# Altium PCB microsmt_pnpboard_v17.pcbdoc (part 1 of 3)
Units mil, origin at the board's own origin, x right, y up, seen from the top; angles counter-clockwise.
Board outline 5834.36 x 5120.39 mil, 2 copper layers (Top Layer, Bottom Layer); 189 components, 130 nets, 641 pads, 1441 vias.
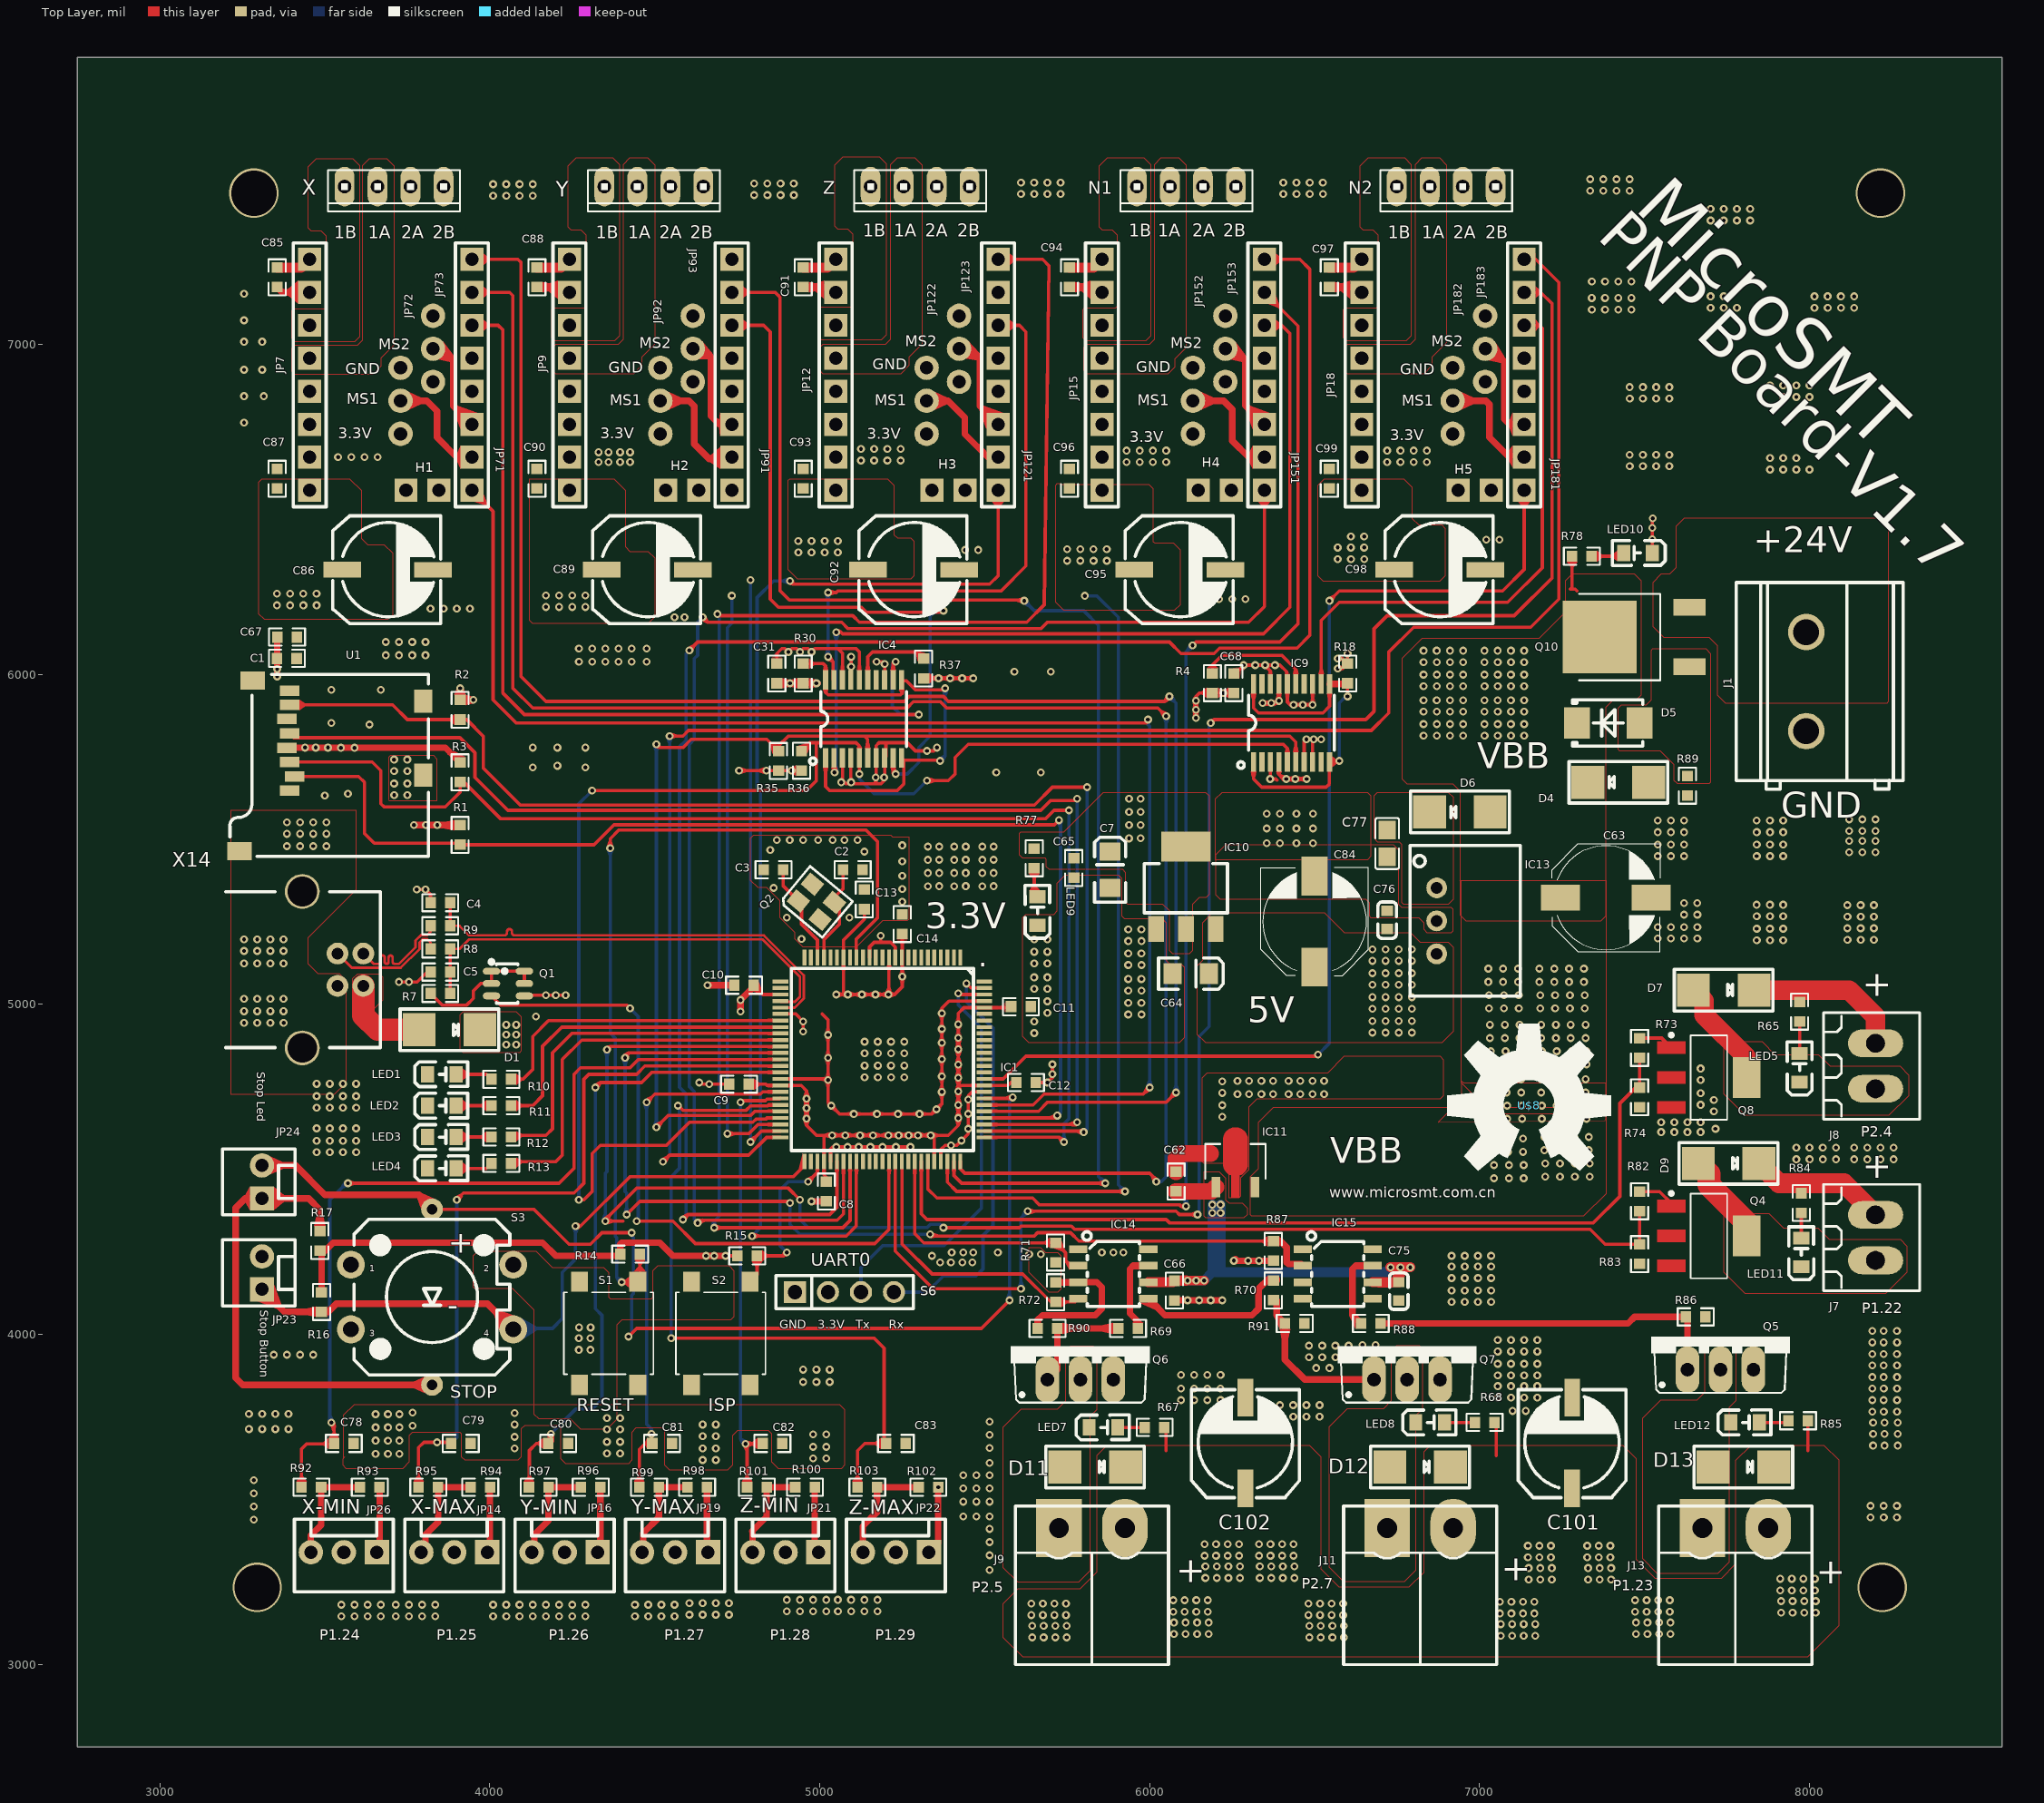
[diagram p0: Top Layer view]
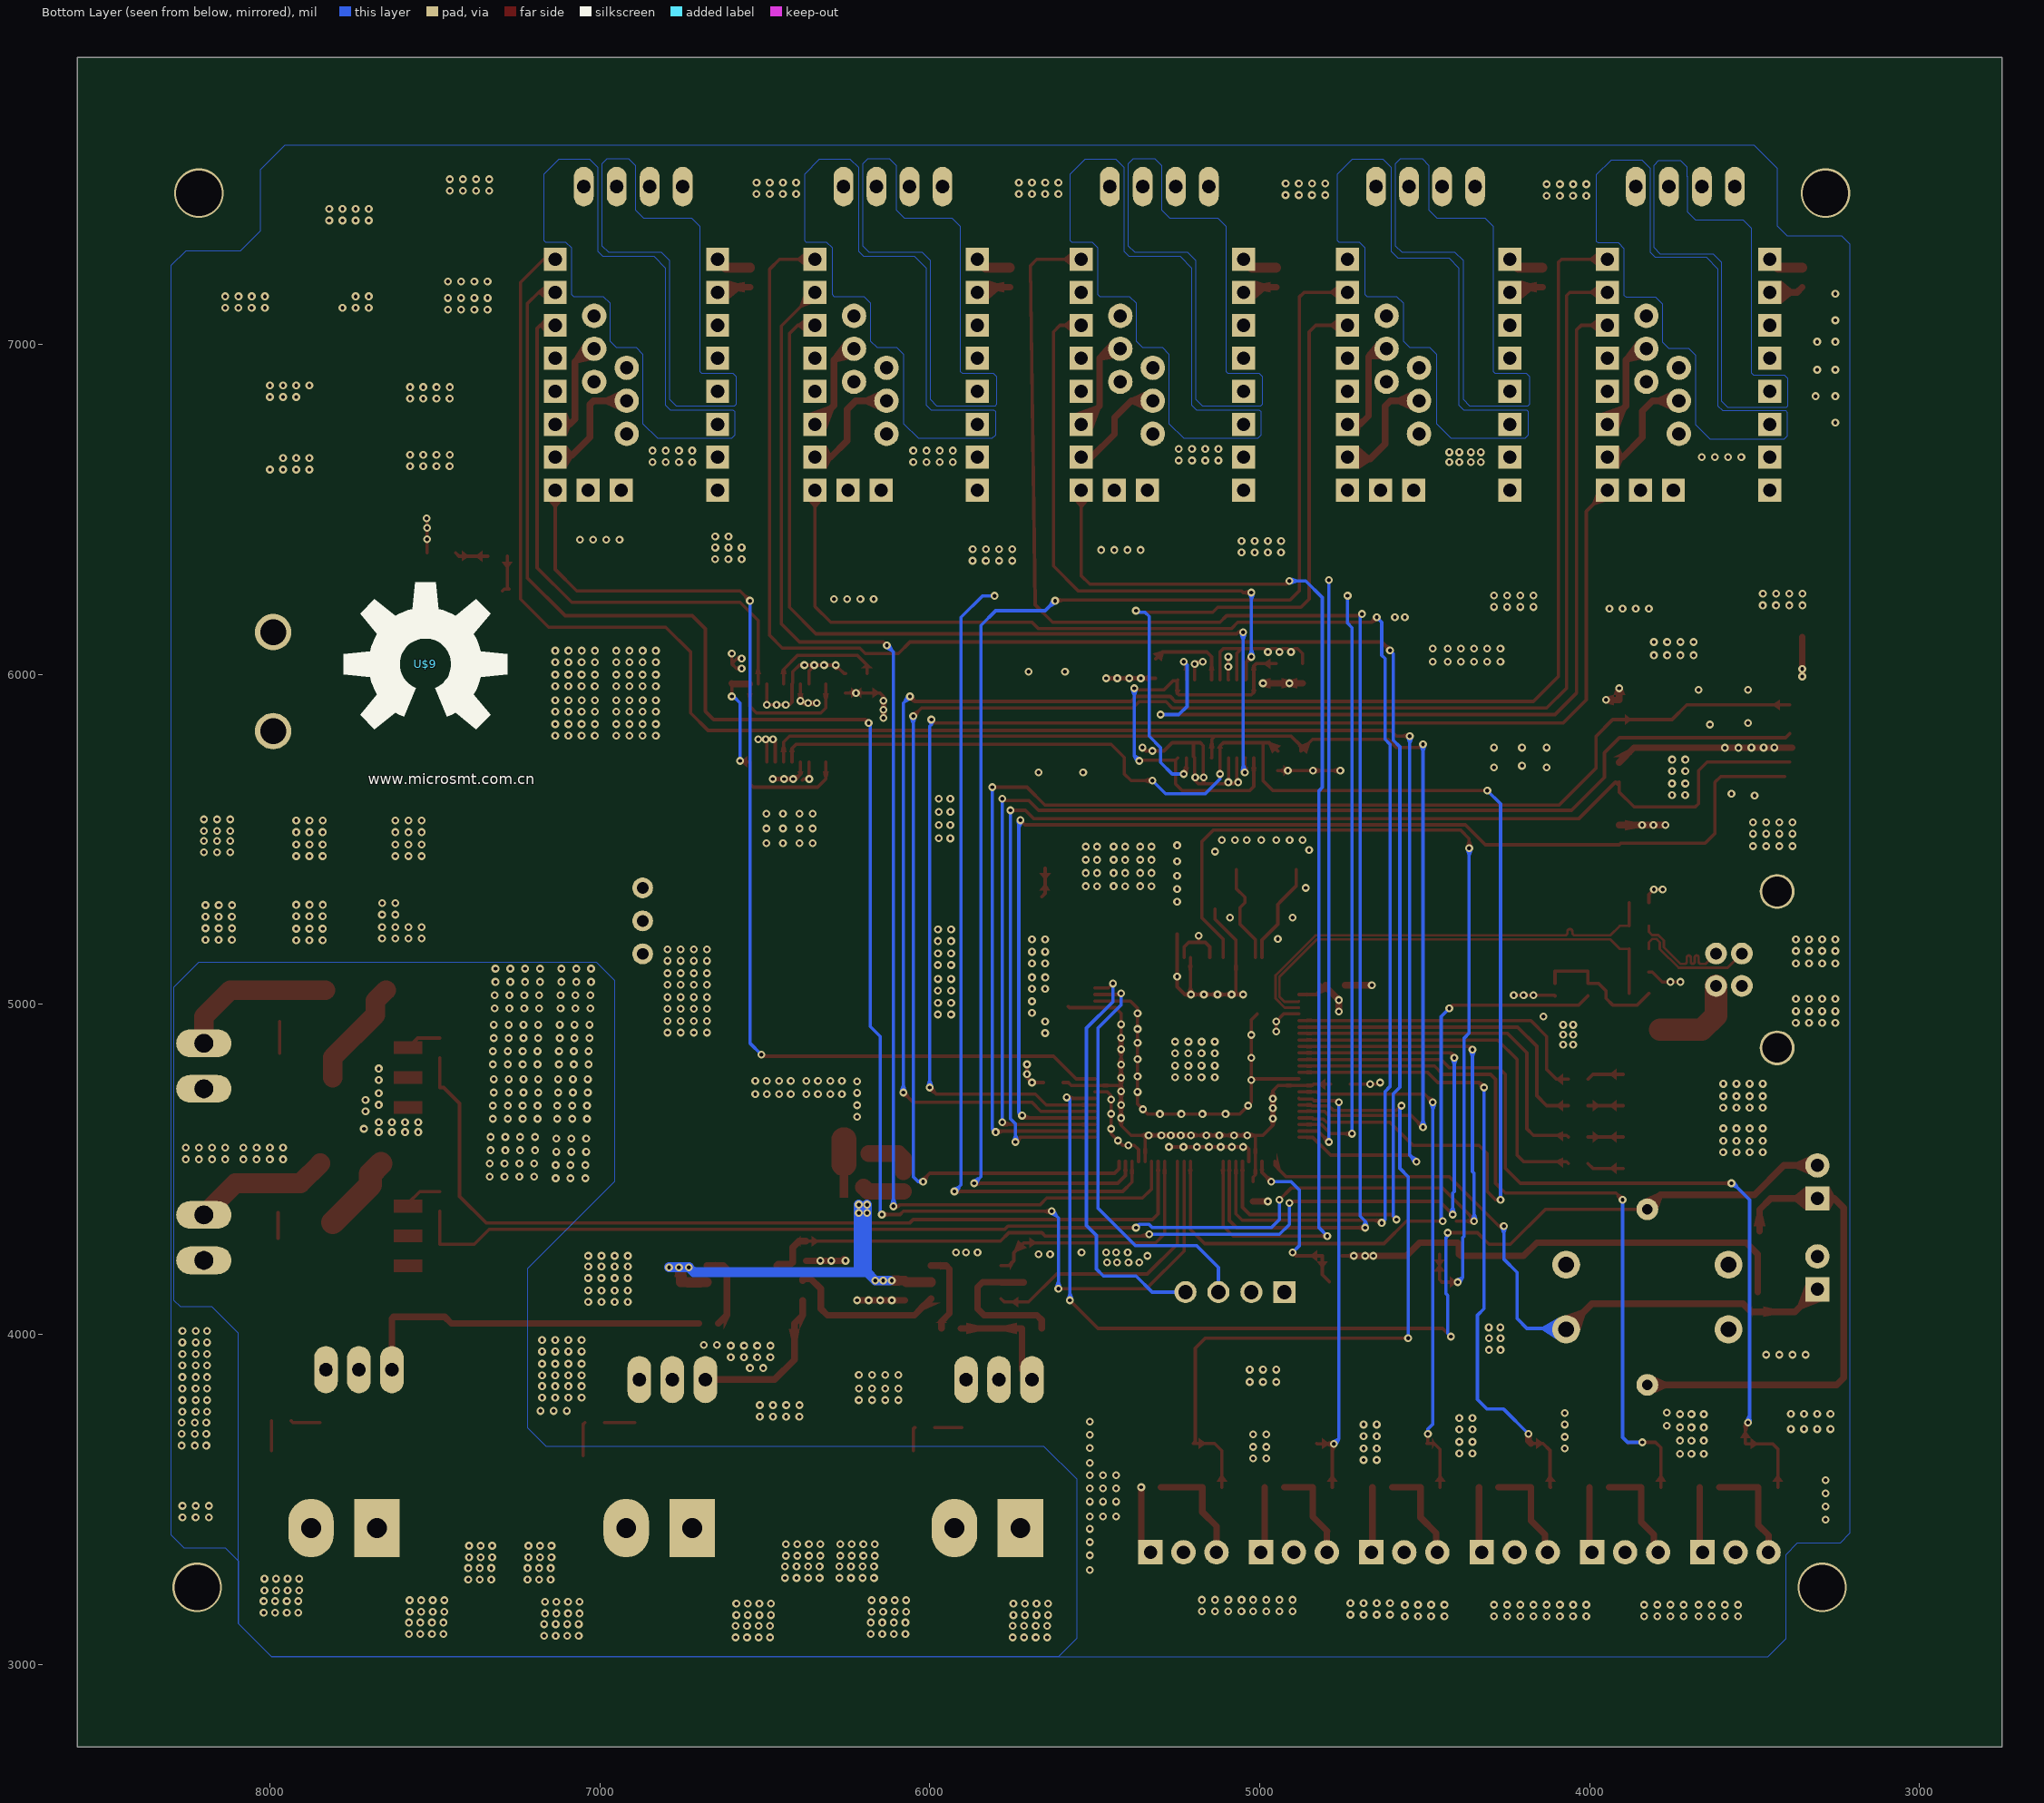
[diagram p1: Bottom Layer view, seen from below]

## Layer stack, top to bottom
Top Solder: solder mask 0.4, Solder Resist, Dk 3.5
Top Layer: signal copper 1.4
Dielectric 1: dielectric 12.6, FR-4, Dk 4.8
Bottom Layer: signal copper 1.4
Bottom Solder: solder mask 0.4, Solder Resist, Dk 3.5

## Board outline
8584.36,2750 2750,2750 2750,7870.39 8584.36,7870.39

## Components (designator, comment, footprint, x,y, rotation, side; value= is the part's Value field where it differs from the comment)
C1 ".1uF" R0603 3385.5,6048.73 r180 top
C2 "12pF" R0603 5100.5,5408.39 r0 top
C3 "12pF" R0603 4860.5,5408.39 r180 top
C4 "18pF" R0603 3850.5,5308.39 r0 top
C5 "18pF" R0603 3850.5,5098.39 r0 top
C7 "10uF" EIA3216 5880.5,5408.39 r90 top
C8 ".1uF" R0603 5020.5,4433.05 r90 top
C9 ".1uF" R0603 4755.84,4758.39 r0 top
C10 ".1uF" R0603 4770.84,5058.39 r0 top
C11 ".1uF" R0603 5610.16,4993.39 r180 top
C12 ".1uF" R0603 5625.84,4763.39 r180 top
C13 ".1uF" R0603 5135.5,5318.39 r270 top
C14 ".1uF" R0603 5250.5,5243.73 r270 top
C31 ".1uF" R0603 4870.5,6003.05 r270 top
C62 ".1uF" R0603 6080.5,4463.39 r90 top
C63 "100uF" SMD8X10.5MM 7245.5,5323.39 r0 top
C64 "10uF" EIA3216 6125.5,5093.39 r0 top
C65 ".1uF" R0603 5770.5,5413.73 r270 top
C66 ".1uF" R0603 6075.5,4133.05 r270 top
C67 "1uF" R0603 3385.84,6113.39 r180 top
C68 ".1uF" R0603 6255.5,5973.73 r270 top
C75 ".1uF" C0603 6755.5,4130.95 r270 top
C76 ".1uF" C0603 6720.5,5255.83 r90 top
C77 ".33uF" C0805 6720.5,5487.84 r270 top
C78 ".1uF" R0603 3558.14,3669.81 r0 top
C79 ".1uF" R0603 3912.47,3669.81 r0 top
C80 ".1uF" R0603 4207.74,3669.81 r0 top
C81 ".1uF" R0603 4522.7,3669.81 r0 top
C82 ".1uF" R0603 4857.35,3669.81 r0 top
C83 ".1uF" R0603 5231.36,3669.81 r0 top
C84 "100uF" SMD8X10.5MM 6500.5,5113.39 r90 top
C85 "100nF" R0603 3355.97,7203.43 r90 top
C86 "100uF" 贴片铝电解8*10.5 3552.82,6317.6 r0 top
C87 "100nF" R0603 3355.97,6593.19 r90 top
C88 "100nF" R0603 4143.37,7203.43 r90 top
C89 "100uF" 贴片铝电解8*10.5 4340.22,6317.6 r0 top
C90 "100nF" R0603 4143.37,6593.19 r90 top
C91 "100nF" R0603 4950.46,7203.43 r90 top
C92 "10uF" 贴片铝电解8*10.5 5147.31,6317.6 r0 top
C93 "100nF" R0603 4950.46,6593.19 r90 top
C94 "100nF" R0603 5757.55,7203.43 r90 top
C95 "100uF" 贴片铝电解8*10.5 5954.4,6317.6 r0 top
C96 "100nF" R0603 5757.55,6593.19 r90 top
C97 "100nF" R0603 6544.95,7203.43 r90 top
C98 "100uF" 贴片铝电解8*10.5 6741.8,6317.6 r0 top
C99 "100nF" R0603 6544.95,6593.19 r90 top
C101 "10uF" 贴片铝电解8*10.5 7280.5,3533.39 r90 top
C102 "10uF" 贴片铝电解8*10.5 6290.5,3533.39 r90 top
D1 "MBRA210LT3" SMADIODE 3878.5,4923.39 r180 top
D4 "B1100-13-F" SMADIODE 7420.5,5673.39 r0 top
D5 "15v" SMB_L4.4-W3.6-LS5.3-RD 7390.5,5853.39 r0 top
D6 "MBRA210LT3" SMADIODE 6940.5,5583.39 r0 top
D7 "MBRA210LT3" SMADIODE 7740.5,5043.39 r180 top
D9 "MBRA210LT3" SMADIODE 7755.5,4518.39 r180 top
D11 "MBRA210LT3" SMADIODE 5835.5,3598.39 r180 top
D12 "MBRA210LT3" SMADIODE 6820.5,3598.39 r180 top
D13 "MBRA210LT3" SMADIODE 7800.5,3598.39 r180 top
H1 "HDR-F_2.54_1x2P" HDR-TH_2P-P2.54-V-F#1 3795.5,6558.39 r0 top
H2 "HDR-F_2.54_1x2P" HDR-TH_2P-P2.54-V-F#2 4595.5,6558.39 r0 top
H3 "HDR-F_2.54_1x2P" HDR-TH_2P-P2.54-V-F#3 5385.5,6548.39 r0 top
H4 "HDR-F_2.54_1x2P" HDR-TH_2P-P2.54-V-F#4 6200.5,6553.39 r0 top
H5 "HDR-F_2.54_1x2P" HDR-TH_2P-P2.54-V-F#5 6990.5,6553.39 r0 top
IC1 "LPC1769" LQFP100_14X14 5190.5,4833.39 r270 top
IC4 "MCP44X1" TSSOP-20_L6.5-W4.4-P0.65-LS6.4-TL 5133.3,5865.23 r90 top
IC9 "MCP44X1" TSSOP-20_L6.5-W4.4-P0.65-LS6.4-TL 6430.5,5853.39 r90 top
IC10 "LM1117-3.3V" PG-SOT223-4_L6.5-W3.5-P2.30-LS7.0-BR 6110.5,5353.39 r270 top
IC11 "78L12F" SOT-89-3_L4.5-W2.5-P1.50-LS4.2-TL 6260.16,4499.99 r90 top
IC13 "R-78E-5.0" PWRM-TH_R-78E3.3-0.5 6870.5,5253.39 r270 top
IC14 "TC4427" SOIC8-1.27-5X4MM 5890.5,4183.39 r270 top
IC15 "TC4427" SOIC8-1.27-5X4MM 6570.5,4183.39 r270 top
J1 "MTA02-100" CONN-TH_P7.62_KF7620-7.62-2P 7990.5,5978.39 r90 top
J7 "MTA02-100" 180G-2 8200.5,4293.39 r270 top
J8 "MTA02-100" 180G-2 8200.5,4813.39 r270 top
J9 "MTA02-100" KF2EDG5.08-2P 5825.5,3413.39 r0 top
J11 "MTA02-100" KF2EDG5.08-2P 6820.5,3413.39 r0 top
J13 "MTA02-100" KF2EDG5.08-2P 7775.5,3413.39 r0 top
JP7 "PINHD-1X8" 1X08-BIG 3454.4,6908.15 r270 top
JP9 "PINHD-1X8" 1X08-BIG 4241.8,6908.15 r270 top
JP12 "PINHD-1X8" 1X08-BIG 5048.89,6908.15 r270 top
JP14 "M03POLAR" MOLEX-1X3 3892.78,3340.16 r180 top
JP15 "PINHD-1X8" 1X08-BIG 5855.97,6908.15 r270 top
JP16 "M03POLAR" MOLEX-1X3 4227.43,3340.16 r180 top
JP18 "PINHD-1X8" 1X08-BIG 6643.37,6908.15 r270 top
JP19 "M03POLAR" MOLEX-1X3 4562.07,3340.16 r180 top
JP21 "M03POLAR" MOLEX-1X3 4896.72,3340.16 r180 top
JP22 "M03POLAR" MOLEX-1X3 5231.36,3340.16 r180 top
JP23 "M02PTH" MOLEX-1X2 3310.03,4186.62 r90 top
JP24 "M02PTH" MOLEX-1X2 3310.03,4462.21 r90 top
JP26 "M03POLAR" MOLEX-1X3 3558.14,3340.16 r180 top
JP71 "PINHD-1X8" 1X08-BIG 3946.53,6908.15 r270 top
JP72 "CON_HEADER_1X03-PTH" 1X03_NO_SILK 3729.99,6829.41 r90 top
JP73 "CON_HEADER_1X03-PTH" 1X03_NO_SILK 3828.41,6986.89 r90 top
JP91 "PINHD-1X8" 1X08-BIG 4733.93,6908.15 r270 top
JP92 "CON_HEADER_1X03-PTH" 1X03_NO_SILK 4517.39,6829.41 r90 top
JP93 "CON_HEADER_1X03-PTH" 1X03_NO_SILK 4615.81,6986.89 r90 top
JP121 "PINHD-1X8" 1X08-BIG 5541.01,6908.15 r270 top
JP122 "CON_HEADER_1X03-PTH" 1X03_NO_SILK 5324.48,6829.41 r90 top
JP123 "CON_HEADER_1X03-PTH" 1X03_NO_SILK 5422.9,6986.89 r90 top
JP151 "PINHD-1X8" 1X08-BIG 6348.1,6908.15 r270 top
JP152 "CON_HEADER_1X03-PTH" 1X03_NO_SILK 6131.56,6829.41 r90 top
JP153 "CON_HEADER_1X03-PTH" 1X03_NO_SILK 6229.99,6986.89 r90 top
JP181 "PINHD-1X8" 1X08-BIG 7135.49,6908.15 r270 top
JP182 "CON_HEADER_1X03-PTH" 1X03_NO_SILK 6918.96,6829.41 r90 top
JP183 "CON_HEADER_1X03-PTH" 1X03_NO_SILK 7017.39,6986.89 r90 top
LED1 "LEDCHIP-LED0805" LED0805-RD 3855.5,4788.39 r0 top
LED2 "LEDCHIP-LED0805" LED0805-RD 3855.5,4693.39 r0 top
LED3 "LEDCHIP-LED0805" LED0805-RD 3855.5,4598.39 r0 top
LED4 "LEDCHIP-LED0805" LED0805-RD 3855.5,4503.39 r0 top
LED5 "LEDCHIP-LED0805" LED0805-RD 7970.5,4808.39 r90 top
LED7 "LEDCHIP-LED0805" LED0805-RD 5860.5,3718.39 r0 top
LED8 "LEDCHIP-LED0805" LED0805-RD 6850.5,3733.39 r0 top
LED9 "LEDCHIP-LED0805" LED0805-RD 5660.5,5283.39 r90 top
LED10 "LEDCHIP-LED0805" LED0805-RD 7480.5,6368.39 r180 top
LED11 "LEDCHIP-LED0805" LED0805-RD 7975.5,4248.39 r90 top
LED12 "LEDCHIP-LED0805" LED0805-RD 7805.5,3733.39 r0 top
N1 "10X04MTA" 10X04MTA 6111.88,7478.39 r180 top
N2 "10X04MTA" 10X04MTA 6899.28,7478.39 r180 top
Q1 "BSL207SP" TSOP-6_L3.0-W1.5-P0.95-LS2.8-BL 4055.5,5063.39 r270 top
Q2 "12MHz" 3.2*2.5_3225贴片无源晶振 4935.5,5313.39 r320 top
Q4 "ZXMN4A06" SOT230P700X160-4N 7695.5,4298.39 r0 top
Q5 "AOT240L" TO220BV 7730.5,3993.39 r0 top
Q6 "AOT240L" TO220BV 5790.5,3963.39 r0 top
Q7 "AOT240L" TO220BV 6780.5,3963.39 r0 top
Q8 "ZXMN4A06" SOT230P700X160-4N 7695.5,4778.39 r0 top
Q10 "SUD50P04-08-GE3" PG-TO252-3_L6.6-W6.0-P4.56-LS10.0-BR-CW 7500.5,6113.39 r0 top
R1 "10K" R0603 3910.5,5513.73 r90 top
R2 "10K" R0603 3910.5,5893.05 r90 top
R3 "10K" R0603 3910.5,5703.73 r90 top
R4 "100K" R0603 6190.5,5973.73 r270 top
R7 "1.5K" R0603 3850.5,5033.39 r180 top
R8 "33R" R0603 3850.5,5168.39 r0 top
R9 "33R" R0603 3850.5,5238.39 r0 top
R10 "1k" R0603 4035.5,4773.39 r0 top
R11 "1k" R0603 4035.5,4693.39 r0 top
R12 "1k" R0603 4035.5,4598.39 r0 top
R13 "1k" R0603 4035.5,4518.39 r0 top
R14 "10K" R0603 4425.84,4243.39 r180 top
R15 "10K" R0603 4780.84,4238.39 r180 top
R16 "10K" R0603 3490.5,4098.39 r90 top
R17 "330R" R0603 3485.5,4283.39 r90 top
R18 "33K" R0603 6600.5,6003.05 r90 top
R30 "33K" R0603 4950.5,6003.05 r270 top
R35 "2.2k" R0603 4875.5,5738.05 r270 top
R36 "2.2k" R0603 4945.5,5738.39 r270 top
R37 "100K" R0603 5315.5,6018.05 r270 top
R65 "8.2K" R0603 7970.5,4978.39 r270 top
R67 "8.2K" R0603 6015.5,3718.39 r180 top
R68 "8.2K" R0603 7015.5,3733.39 r180 top
R69 "22R" R0603 5935.16,4018.39 r180 top
R70 "22R" R0603 6375.5,4133.73 r270 top
R71 "10k" R0603 5715.5,4248.05 r90 top
R72 "10k" R0603 5715.5,4128.05 r270 top
R73 "22R" R0603 7485.5,4868.39 r270 top
R74 "10k" R0603 7485.5,4718.73 r270 top
R77 "1k" R0603 5650.5,5443.05 r90 top
R78 "8.2K" R0603 7310.5,6358.39 r180 top
R82 "22R" R0603 7485.5,4403.39 r270 top
R83 "10k" R0603 7485.5,4243.39 r270 top
R84 "8.2K" R0603 7975.5,4398.39 r270 top
R85 "8.2K" R0603 7965.5,3738.39 r180 top
R86 "10k" R0603 7655.5,4053.39 r0 top
R87 "10k" R0603 6375.5,4253.05 r90 top
R88 "22R" R0603 6670.84,4033.39 r180 top
R89 "10k" R0603 7630.5,5663.05 r270 top
R90 "10k" R0603 5690.84,4018.39 r180 top
R91 "10k" R0603 6440.16,4033.39 r0 top
R92 "5k6" R0603 3459.72,3537.01 r180 top
R93 "1k" R0603 3636.88,3537.01 r0 top
R94 "1k" R0603 3971.53,3537.01 r0 top
R95 "5k6" R0603 3814.05,3537.01 r180 top
R96 "1k" R0603 4306.17,3537.01 r0 top
R97 "5k6" R0603 4148.69,3537.01 r180 top
R98 "1k" R0603 4629,3537.01 r0 top
R99 "5k6" R0603 4483.34,3537.01 r180 top
R100 "1k" R0603 4955.77,3537.01 r0 top
R101 "5k6" R0603 4810.11,3537.01 r180 top
R102 "1k" R0603 5329.79,3537.01 r0 top
R103 "5k6" R0603 5144.75,3537.01 r180 top
S1 "TAC_SWITCHSMD" SW_SPST_B3S-1000 4360.5,4003.39 r270 top
S2 "TAC_SWITCHSMD" SW_SPST_B3S-1000 4700.5,4003.39 r270 top
S3 "SWITCH-MOMENTARY-LEDPTH" TACTILE-PTH-LED-12MM 3825.5,4113.39 r0 top
S6 "10X04MTA" HDR-TH_4P-P2.54-V-M-3 5075.5,4128.39 r0 top
U1 "USD-SOCKETNEW" MICRO-SD-SOCKET-PP 3520.5,5723.39 r90 top
U$8 "OSHW-LOGOH" OSHW-LOGO-HUGE 7150.5,4693.39 r0 top
U$9 "OSHW-LOGOH" OSHW-LOGO-HUGE 7528.89,6031.1 r180 bottom
X "10X04MTA" 10X04MTA 3710.3,7478.39 r180 top
X14 "USBPTH" USB-B-PTH 3524.5,5105.39 r0 top
Y "10X04MTA" 10X04MTA 4497.7,7478.39 r180 top
Z "10X04MTA" 10X04MTA 5304.79,7478.39 r180 top

## Footprints (in the part's own frame and the unit in brackets; to place one, negate y for a bottom-side part, rotate by r counter-clockwise, add the part's x,y. Pads: shape width x height; smd on the part's side, far side on the other; paste and mask are expansions set on the pad)
1X03_NO_SILK [mil]
  round 74 hole 40: 1(-100,0) 2(0,0) 3(100,0)
1X08-BIG [mil]
  rect 70x70 hole 40: 1(-350,0) 2(-250,0) 3(-150,0) 4(-50,0) 5(50,0) 6(150,0) 7(250,0) 8(350,0)
  silkscreen extent -400,-50 400,50
3.2*2.5_3225贴片无源晶振 [mm]
  rect 1.4x1.199 smd: 1(0,0) 2(0.001,1.699) 3(2.2,1.7) 4(2.201,0)
  silkscreen extent -1.02,-0.97 3.23,2.66
10X04MTA [mil]
  oval 60x120 hole 40 slot 40.2 at 90 deg: 1(150,0) 2(50,0) 3(-50,0) 4(-150,0)
  silkscreen extent -200,-50 200,75
180G-2 [mil]
  oval 84x168 hole 56 slot 56.2 at 90 deg: 1(-68.9,0) 2(68.9,0)
  silkscreen extent -161,-157 161,134
C0603 [mm]
  rect 0.8x0.9 smd: 1(-0.7,0) 2(0.7,0)
  silkscreen extent -1.41,-0.71 1.39,0.72
C0805 [mm]
  rect 1.41x1.35 smd: 1(-1.03,0) 2(1.03,0)
  silkscreen extent -1.96,-0.9 1.96,0.9
CONN-TH_P7.62_KF7620-7.62-2P [mm]
  round 2.8 hole 2: 1(-3.81,0) 2(3.81,0)
  silkscreen extent -8.29,-7.45 7.62,5.4
EIA3216 [mil]
  rect 55.1x63 smd: A(55,0) C(-55,0)
  silkscreen extent -98,-47 98,47
HDR-TH_2P-P2.54-V-F#1 [mil]
  rect 70x70 hole 40: 1(-48.98,-0.24) 2(51.02,-0.24)
HDR-TH_2P-P2.54-V-F#2 [mil]
  rect 70x70 hole 40: 1(-61.57,-0.24) 2(38.43,-0.24)
HDR-TH_2P-P2.54-V-F#3 [mil]
  rect 70x70 hole 40: 1(-44.49,9.76) 2(55.51,9.76)
HDR-TH_2P-P2.54-V-F#4 [mil]
  rect 70x70 hole 40: 1(-52.4,4.76) 2(47.6,4.76)
HDR-TH_2P-P2.54-V-F#5 [mil]
  rect 70x70 hole 40: 1(-55,4.76) 2(45,4.76)
HDR-TH_4P-P2.54-V-M-3 [mil]
  rect 66.9x66.9 hole 43.3: 1(-150,0)
  round 66.9 hole 43.3: 2(-50,0) 3(50,0) 4(150,0)
  silkscreen extent -208,-50 208,50
KF2EDG5.08-2P [mm]
  rect 3.5x4.5 hole 1.524: 1(-2.54,0)
  oval 3.5x4.5 hole 1.524: 2(2.54,0)
  silkscreen extent -5.9,-10.5 5.9,1.7
LED0805-RD [mm]
  rect 1x1.25 smd: 1(-1.1,0) 2(1.1,0)
  silkscreen extent -2.1,-0.95 1.98,0.96
LQFP100_14X14 [mil]
  rect 47.2x11.8 smd: 1(-309,236) 2(-309,217) 3(-309,197) 4(-309,177) 5(-309,157) 6(-309,138) 7(-309,118) 8(-309,98) 9(-309,79) 10(-309,59) 11(-309,39) 12(-309,20) 13(-309,0) 14(-309,-20) 15(-309,-39) 16(-309,-59) 17(-309,-79) 18(-309,-98) 19(-309,-118) 20(-309,-138) 21(-309,-157) 22(-309,-177) 23(-309,-197) 24(-309,-217) 25(-309,-236) 51(309,-236) 52(309,-217) 53(309,-197) 54(309,-177) 55(309,-157) 56(309,-138) 57(309,-118) 58(309,-98) 59(309,-79) 60(309,-59) 61(309,-39) 62(309,-20) 63(309,0) 64(309,20) 65(309,39) 66(309,59) 67(309,79) 68(309,98) 69(309,118) 70(309,138) 71(309,157) 72(309,177) 73(309,197) 74(309,217) 75(309,236)
  rect 11.8x47.2 smd: 26(-236,-309) 27(-217,-309) 28(-197,-309) 29(-177,-309) 30(-157,-309) 31(-138,-309) 32(-118,-309) 33(-98,-309) 34(-79,-309) 35(-59,-309) 36(-39,-309) 37(-20,-309) 38(0,-309) 39(20,-309) 40(39,-309) 41(59,-309) 42(79,-309) 43(98,-309) 44(118,-309) 45(138,-309) 46(157,-309) 47(177,-309) 48(197,-309) 49(217,-309) 50(236,-309) 76(236,309) 77(217,309) 78(197,309) 79(177,309) 80(157,309) 81(138,309) 82(118,309) 83(98,309) 84(79,309) 85(59,309) 86(39,309) 87(20,309) 88(0,309) 89(-20,309) 90(-39,309) 91(-59,309) 92(-79,309) 93(-98,309) 94(-118,309) 95(-138,309) 96(-157,309) 97(-177,309) 98(-197,309) 99(-217,309) 100(-236,309)
  silkscreen extent -276,-276 276,276
MICRO-SD-SOCKET-PP [mil]
  rect 31.5x59.1 smd: 1(-75.5,126.5) 2(-32.5,111.5) 3(11.5,126.5) 4(54.5,134.5) 5(97.5,126.5) 6(141.5,134.5) 7(184.5,126.5) 8(227.5,126.5)
  rect 70.9x55.1 smd: CD1(195.5,-278.5) CD2(-28.5,-278.5)
  rect 55.1x74.8 smd: GND1(-258.5,278.5) GND3(258.5,238.5)
  silkscreen extent -274,-294 276,308
MOLEX-1X2 [mil]
  rect 74x74 hole 40: 1(-50,0)
  round 74 hole 40: 2(50,0)
  silkscreen extent -100,-100 100,120
MOLEX-1X3 [mil]
  rect 74x74 hole 40: 1(-99.99,0.01)
  round 74 hole 40: 2(-0.01,0.01) 3(99.99,0.01)
  silkscreen extent -150,-100 150,120
OSHW-LOGO-HUGE [mil]
  silkscreen extent -248,-197 248,248
PG-SOT223-4_L6.5-W3.5-P2.30-LS7.0-BR [mm]
  rect 2x1.2 smd: 1(3.175,-2.3) 2(3.175,0) 3(3.175,2.3)
  rect 2.3x3.8 smd: 4(-3.175,0)
  silkscreen extent -1.87,-3.2 1.93,3.2
PG-TO252-3_L6.6-W6.0-P4.56-LS10.0-BR-CW [mm]
  rect 2.5x1.3 smd: 1(3.455,-2.28) 3(3.455,2.28)
  rect 5.7x5.6 smd: 2(-3.455,0)
  silkscreen extent -5.04,-3.33 1.21,3.33
PWRM-TH_R-78E3.3-0.5 [mm]
  round 1.6 hole 0.9: 1(-2.54,0) 2(0,0) 3(2.54,0)
  silkscreen extent -5.8,-2.06 5.8,6.44
R0603 [mil]
  rect 31.75x34.02 smd: 1(-29.66,0) 2(29.66,0)
  silkscreen extent -55,-26 55,26
SMADIODE [mil]
  rect 100x100 smd: A(92,0) C(-92,0)
  silkscreen extent -149,-63 150,63
SMB_L4.4-W3.6-LS5.3-RD [mm]
  rect 2x2.4 smd: 1(-2.4,0) 2(2.4,0)
  silkscreen extent -2.76,-1.78 2.67,1.78
SMD8X10.5MM [mm]
  rect 3x2 smd: 1(0,0) 2(7,0)
  silkscreen extent -0.65,-4.15 7.65,4.15
SOIC8-1.27-5X4MM [mil]
  rect 23.6x55.1 smd: 1(-75,-106) 2(-25,-106) 3(25,-106) 4(75,-106) 5(75,106) 6(25,106) 7(-25,106) 8(-75,106)
  silkscreen extent -128,-93 98,79
SOT230P700X160-4N [mil]
  rect 84.65x124.02 smd: 4(114.17,0)
  Top Layer region: -156.5,71.85 -156.5,109.25 -71.85,109.25 -71.85,71.85
  Top Layer region: -156.5,-18.7 -156.5,18.7 -71.85,18.7 -71.85,-18.7
  Top Layer region: -156.5,-109.25 -156.5,-71.85 -71.85,-71.85 -71.85,-109.25
  silkscreen extent -124,-128 55,139
SOT-89-3_L4.5-W2.5-P1.50-LS4.2-TL [mm]
  rect 1.575x0.672 smd: 1(-1.356,1.5) 3(-1.356,-1.5)
  Top Layer region: 2.283,-0.959 0.429,-0.959 0.384,-0.958 0.34,-0.954 0.296,-0.949 0.252,-0.942 0.208,-0.933 0.165,-0.921 0.123,-0.908 0.081,-0.893 0.04,-0.875 0,-0.856 -0.04,-0.835 -0.078,-0.812 -0.115,-0.787 -0.151,-0.761 -0.185,-0.733 -0.219,-0.704 -0.251,-0.672 -0.281,-0.64 -0.31,-0.606 -0.337,-0.571 -0.362,-0.534 -0.386,-0.496 -0.408,-0.458 -0.428,-0.418 -0.447,-0.339 -2.144,-0.339 -2.144,0.321 -0.447,0.321 -0.428,0.401 -0.408,0.44 -0.386,0.479 -0.362,0.517 -0.337,0.553 -0.31,0.589 -0.281,0.623 -0.251,0.655 -0.219,0.686 -0.185,0.716 -0.151,0.744 -0.115,0.77 -0.078,0.795 -0.04,0.818 0,0.839 0.04,0.858 0.081,0.875 0.123,0.891 0.165,0.904 0.208,0.915 0.252,0.925 0.296,0.932 0.34,0.937 0.384,0.94 0.429,0.941 2.283,0.941 2.328,0.94 2.372,0.937 2.416,0.932 2.46,0.925 2.504,0.915 2.547,0.904 2.589,0.891 2.631,0.875 2.672,0.858 2.712,0.839 2.752,0.818 2.79,0.795 2.827,0.77 2.863,0.744 2.898,0.716 2.931,0.686 2.963,0.655 2.993,0.623 3.022,0.589 3.049,0.553 3.075,0.517 3.098,0.479 3.12,0.44 3.14,0.401 3.159,0.36 3.175,0.319 3.189,0.277 3.202,0.234 3.212,0.19 3.22,0.147 3.227,0.103 3.231,0.058 3.233,0.014 3.233,-0.031 3.231,-0.075 3.227,-0.12 3.22,-0.164 3.212,-0.208 3.202,-0.251 3.189,-0.294 3.175,-0.336 3.159,-0.377 3.14,-0.418 3.12,-0.458 3.098,-0.496 3.075,-0.534 3.049,-0.571 3.022,-0.606 2.993,-0.64 2.963,-0.672 2.931,-0.704 2.898,-0.733 2.863,-0.761 2.827,-0.787 2.79,-0.812 2.752,-0.835 2.712,-0.856 2.672,-0.875 2.631,-0.893 2.589,-0.908 2.547,-0.921 2.504,-0.933 2.46,-0.942 2.416,-0.949 2.372,-0.954 2.328,-0.958
  silkscreen extent -0.69,-2.33 1.96,2.33
SW_SPST_B3S-1000 [mm]
  rect 1.55x1.3 smd: 1(-3.975,2.25) 2(-3.975,-2.25) 3(3.975,2.25) 4(3.975,-2.25)
  silkscreen extent -3.15,-3.45 3.15,3.45
TACTILE-PTH-LED-12MM [mil]
  round 85 hole 47.2: 1(-246,98) 2(246,98) 3(-246,-98) 4(246,-98)
  round 66 hole 31.4: A(0,266) C(0,-266)
  silkscreen extent -236,-236 236,236
TO220BV [mil]
  oval 71.5x142.99 hole 40 slot 40.2 at 90 deg: D(0,-100) G(-100,-100) S(100,-100)
  silkscreen extent -210,-170 210,0
TSOP-6_L3.0-W1.5-P0.95-LS2.8-BL [mil]
  oval 20.95x52.6 smd: 1(-37.4,-49.92) 2(0,-49.92) 3(37.4,-49.92) 4(37.4,49.92) 5(0,49.92) 6(-37.4,49.92)
  silkscreen extent -72,-56 60,30
TSSOP-20_L6.5-W4.4-P0.65-LS6.4-TL [mm]
  rect 1.494x0.4 smd: 1(-3.001,2.925) 2(-3.001,2.275) 3(-3.001,1.625) 4(-3.001,0.975) 5(-3.001,0.325) 6(-3.001,-0.324) 7(-3.001,-0.975) 8(-3.001,-1.625) 9(-3.001,-2.275) 10(-3.001,-2.925) 11(3.001,-2.925) 12(3.001,-2.275) 13(3.001,-1.625) 14(3.001,-0.975) 15(3.001,-0.325) 16(3.001,0.325) 17(3.001,0.975) 18(2.996,1.625) 19(2.996,2.275) 20(3.001,2.925)
  silkscreen extent -3.5,-3.3 2.11,4.15
USB-B-PTH [mil]
  round 66 hole 36: D+(14.5,49) D-(92.5,49) GND(14.5,-49) VBUS(92.5,-49)
  round 105.7 hole 90: S1(-92.5,-237) S2(-92.5,237)
  silkscreen extent -324,-236 144,236
贴片铝电解8*10.5 [mm]
  rect 2.9x1.2 smd: 1(0,0) 2(7,-0.01)
  silkscreen extent -0.71,-4.16 7.6,4.14

## Via types
v1: diameter 24, hole 12, Top Layer to Bottom Layer, 1009 vias
v2: diameter 24.02, hole 12.01, Top Layer to Bottom Layer, 428 vias
v3: diameter 149.61, hole 137.8, Top Layer to Bottom Layer, 4 vias

## Nets (pads, with @x,y where several pads share a name; then routed paths per layer and width w, separated by ;. In a path a pad name is that pad's centre, name@x,y a point inside that pad or via, vN(x,y) a via of type N, cw(c..) or ccw(c..) an arc to the next point about the centre after c; other vN are vias at no path point)
1A: JP7.4 X.2
1B: JP7.3 X.1
2A: JP7.5 X.3
2B: JP7.6 X.4
3.3V: C1.2 C7.A C8.2 C9.2 C10.2 C11.2 C12.2 C13.2 C14.2 C31.2 C65.1 C67.2 C68.2 C85.1 C88.1 C91.1 C94.1 C97.1 IC1.10 IC1.12 IC1.19 IC1.28 IC1.42 IC1.54 IC1.71 IC1.84 IC1.96 IC4.17 IC9.4 IC9.17 IC10.2 IC10.4 JP7.2 JP9.2 JP12.2 JP15.2 JP18.2 JP72.1 JP73.1 JP92.1 JP93.1 JP122.1 JP123.1 JP152.1 JP153.1 JP182.1 JP183.1 Q1.4 R1.2 R2.2 R3.2 R4.2 R14.2 R15.2 R16.2 R17.1 R18.2 R30.2 R35.2 R36.2 R37.2 R77.2 S6.2 U1.4 | length 6695.8
  Top Layer w10: Q1.4@4105.42,5025.99 4107.82,5028.39 v2(4170.5,5028.39) v2(4200.5,5028.39) v2(4230.5,5028.39) ; v1@4721.83,4238.39 R15.2@4751.18,4238.39 ; v1@4755.5,5708.39 v1(4755.84,5708.73) v1(4838.79,5708.73) v1(4914.98,5708.73) R36.2@4945.5,5708.73 ; C9.2@4785.5,4758.39 4836.9,4758.39 4840.9,4754.38 IC1.42@4881.5,4754.38 4944.5,4754.38 4960.5,4738.39 v1(4960.5,4715.02) v1(4960.5,4686.15) v1(4960.5,4654.34) 4960.5,4633.39 4990.5,4603.39 5010.09,4603.39 ; C10.2@4800.5,5058.39 4828.5,5030.38 IC1.28@4881.5,5030.38 ; C8.2@5020.5,4462.71 5020.5,4476.78 5013.5,4483.78 IC1.54@5013.5,4524.38 5013.5,4599.98 5010.09,4603.39 ; v1(5050.32,5030.38) 5068.08,5030.38 ; IC4.17@5094.91,5983.39 5095.5,5983.98 v1(5095.5,6023.39) v1(5095.5,6053.39) ; C13.2@5135.5,5288.73 5135.5,5258.39 5072.5,5195.39 IC1.19@5072.5,5142.38 5072.5,5034.81 5068.08,5030.38 ; IC1.12@5210.5,5142.38 5210.5,5037.61 v1@5203.28,5030.38 ; C14.2@5250.5,5214.07 5250.5,5143.38 IC1.10@5249.5,5142.38 5250.5,5141.38 v1(5250.5,5084.32) 5250.5,5053.39 5227.5,5030.38 v1@5203.28,5030.38 ; R37.2@5315.5,5988.39 v1(5360.74,5988.39) v1(5395.5,5988.39) v1(5432.02,5988.39) v1(5465.5,5988.39) ; IC1.71@5347.5,4524.38 5347.5,4602.56 v1@5348.33,4603.39 ; C11.2@5580.5,4993.39 5577.5,4990.38 IC1.96@5499.5,4990.38 5437.5,4990.38 5420.5,4973.39 v1(5420.5,4939.66) v1(5420.5,4898.57) v1(5420.5,4864.11) v1(5420.5,4817.72) v1(5420.5,4777.95) 5420.5,4754.57 ; C12.2@5596.18,4763.39 5580.5,4763.39 5571.5,4754.38 IC1.84@5499.5,4754.38 5420.69,4754.38 5420.5,4754.57 ; v1(6140.5,5868.39) v1(6140.5,5892.72) v1(6140.5,5920.21) 6140.5,5933.39 6151.18,5944.07 R4.2@6190.5,5944.07 v1(6224.02,5944.07) C68.2@6255.5,5944.07 ; v1@6335.5,5913.39 v1(6369,5913.39) 6385.5,5913.39 v1(6392.11,5920) IC9.17@6392.11,5971.54 ; IC9.4@6392.11,5735.24 6392.11,5696.77 6405.5,5683.39 v1(6442.01,5683.39) v1(6476.57,5683.39) ; v1(6570.5,6018.39) 6586.18,6018.39 R18.2@6600.5,6032.71 ; v1(6570.5,6048.39) 6584.82,6048.39 R18.2@6600.5,6032.71 ; v1(6600.5,6063.39) R18.2@6600.5,6032.71 ; 5010.09,4603.39 v1(5038.47,4603.39) v1(5078.14,4603.39) v1(5122.62,4603.39) v1(5162.28,4603.39) v1(5208.92,4603.39) v1(5239.56,4603.39) v1(5269.8,4603.39) v1(5298.47,4603.39) v1@5348.33,4603.39 ; 5068.08,5030.38 v1(5085.8,5030.38) v1(5128.21,5030.38) v1(5169.45,5030.38) v1@5203.28,5030.38 ; v1@5348.33,4603.39 5390.5,4603.39 5420.5,4633.39 v1(5420.5,4656.01) v1(5420.5,4695.77) v1(5420.5,4736.86) 5420.5,4754.57
  Top Layer w19.68: v2(4760.5,4978.39) v2(4760.5,5013.39) 4800.5,5053.39 C10.2@4800.5,5058.39
  Top Layer w20: v1@3355.5,5993.39 v1(3356.18,5994.07) v1(3356.18,6016.46) C67.2@3356.18,6113.39 ; C85.1@3355.97,7173.77 3371.59,7158.15 JP7.2@3454.4,7158.15 ; U1.4@3386,5777.89 v1(3548.98,5777.89) v1(3590.22,5777.89) 3866,5777.89 R3.2@3910.5,5733.39 ; R16.2@3490.5,4128.05 3490.5,4243.39 3525.5,4278.39 4160.5,4278.39 4200.5,4238.39 4391.18,4238.39 R14.2@4396.18,4243.39 4396.18,4274.07 4400.5,4278.39 4515.5,4278.39 4555.5,4238.39 v1(4655.63,4238.39) v1(4680.97,4238.39) v1(4715.13,4238.39) v1@4721.83,4238.39 ; v1(3770.5,5543.39) v1(3807.16,5543.39) v1(3841.46,5543.39) R1.2@3910.5,5543.39 ; v1(3910.5,5958.39) R2.2@3910.5,5922.71 3949.82,5922.71 v1(3950.5,5923.39) ; C88.1@4143.37,7173.77 4226.18,7173.77 JP9.2@4241.8,7158.15 ; C31.2@4870.5,5973.39 v1(4910.5,5973.39) R30.2@4950.5,5973.39 v1@4994.27,5973.39 ; C91.1@4950.46,7173.77 5033.27,7173.77 JP12.2@5048.89,7158.15 ; C94.1@5757.55,7173.77 5840.35,7173.77 JP15.2@5855.97,7158.15 ; C97.1@6544.95,7173.77 6627.75,7173.77 JP18.2@6643.37,7158.15
  other v1: 5336.95,4603.39 5208.33,5030.38 5328,5358.42 5363,5358.48 5408,5358.42 5443,5358.48 5493,5358.42 5528,5358.48 5328,5398.38 5363,5398.44 5408,5398.38 5443,5398.44 5493,5398.38 5528,5398.44 5328,5438.33 5363,5438.4 5408,5438.33 5443,5438.4 5493,5438.33 5528,5438.4 5328,5478.29 5363,5478.35 5408,5478.29 5443,5478.35 5493,5478.29 5528,5478.35 5938,5503.42 5973,5503.48 5938,5543.38 5973,5543.44 5938,5583.33 5973,5583.4 5938,5623.29 5973,5623.35 6414.78,5683.39 3440.5,5778.39 3472.74,5778.39 3510.05,5778.39 6342.82,5913.39 4990.5,5973.39
5V: C64.A C76.1 C84.1 D1.C IC10.3 IC13.3 JP14.1 JP16.1 JP19.1 JP21.1 JP22.1 JP26.1 R93.2 R94.2 R96.2 R98.2 R100.2 R102.2 | length 1209.3
  Top Layer w19.68: JP26.1@3658.13,3340.15 3666.54,3348.56 R93.2@3666.54,3537.01 ; JP14.1@3992.78,3340.15 4001.18,3348.56 R94.2@4001.18,3537.01 ; JP16.1@4327.42,3340.15 4335.83,3348.56 R96.2@4335.83,3537.01 ; R98.2@4658.66,3537.01 4658.66,3343.56 JP19.1@4662.06,3340.15 ; R100.2@4985.44,3537.01 4985.44,3351.44 JP21.1@4996.71,3340.15 ; JP22.1@5331.35,3340.15 5359.45,3368.25 v2(5359.45,3537.01)
  other v1: 6675.61,4914.64 6715.57,4914.64 6755.53,4914.64 6795.48,4914.64 6675.55,4949.64 6715.51,4949.64 6755.46,4949.64 6795.42,4949.64 6675.58,4987.14 6715.54,4987.14 6755.49,4987.14 6795.45,4987.14 6675.52,5022.14 6715.47,5022.14 6755.43,5022.14 6795.39,5022.14 6675.61,5059.64 6715.57,5059.64 6755.53,5059.64 6795.48,5059.64 6675.55,5094.64 6715.51,5094.64 6755.46,5094.64 6795.42,5094.64 6675.58,5132.14 6715.54,5132.14 6755.49,5132.14 6795.45,5132.14 6675.52,5167.14 6715.47,5167.14 6755.43,5167.14 6795.39,5167.14
  other v2: 4050.5,4878.38 4080.5,4878.39 4050.5,4908.39 4080.5,4908.39 4050.5,4938.39 4080.5,4938.39
12VREG: C62.1 C66.1 C75.1 IC11.1 IC14.6 IC15.6 | length 1579.6
  Top Layer w30: IC14.6@5996.5,4158.39 6071.18,4158.39 6076.18,4163.39 v2(6115.26,4163.39) v2(6141.66,4163.39) v2(6165.5,4163.39) ; IC15.6@6676.5,4158.39 6755.38,4158.39 C75.1@6755.5,4158.51 6755.5,4198.39 v2(6760.5,4203.39) ; v2(6730.5,4203.39) v2(6760.5,4203.39) ; v2(6790.5,4203.39) v2(6760.5,4203.39)
  Top Layer w50: C62.1@6080.5,4433.73 6188.24,4433.73 IC11.1@6201.1,4446.59
  Bottom Layer w30: v2@6120.5,4163.39 v2(6141.66,4163.39) v2(6165.5,4163.39) 6190.5,4188.39 ; v2(6190.5,4393.39) v2(6190.5,4368.39) 6190.5,4188.39 ; v2(6215.5,4393.39) v2(6215.5,4368.39) 6215.5,4188.39 ; v2(6790.5,4203.39) v2(6760.5,4203.39) v2(6730.5,4203.39) 6715.5,4188.39 6215.5,4188.39 ; 6190.5,4188.39 6215.5,4188.39
$1N722: C2.1 IC1.22 Q2.3 | length 302.7
  Top Layer w10: IC1.22@5013.5,5142.38 5013.5,5196.39 5060.5,5243.39 5060.5,5293.35 Q2.3@5044.87,5308.98 5044.87,5324.75 5070.84,5350.72 C2.1@5070.84,5408.39
$1N723: C3.1 IC1.23 Q2.1 | length 308.8
  Top Layer w10: C3.1@4890.16,5408.39 4890.16,5358.74 Q2.1@4935.51,5313.39 4945.5,5303.4 4945.5,5243.39 4993.5,5195.39 IC1.23@4993.5,5142.38
$1N774: R8.1 X14.D+ | length 371.8
  Top Layer w7.5: X14.D+@3539,5154.39 3582.25,5111.14 3730.47,5111.14 3787.5,5168.17 3787.5,5188.39 3797.5,5198.39 3810.67,5198.39 3820.84,5188.22 R8.1@3820.84,5168.39
$1N775: R9.1 X14.D- | length 367.2
  Top Layer w7.5: X14.D-@3617,5154.39 3648.25,5123.14 3663.88,5123.14 ccw(c3663.88,5129.14) 3669.88,5129.14 3669.88,5142.39 cw(c3675.88,5142.39) 3675.88,5148.39 cw(c3675.88,5142.39) 3681.88,5142.39 3681.88,5129.14 ccw(c3687.88,5129.14) 3687.88,5123.14 ccw(c3687.88,5129.14) 3693.88,5129.14 3693.88,5142.39 cw(c3699.88,5142.39) 3699.88,5148.39 cw(c3699.88,5142.39) 3705.88,5142.39 3705.88,5129.14 ccw(c3711.88,5129.14) 3711.88,5123.14 3725.5,5123.14 3775.5,5173.14 3775.5,5193.36 3792.53,5210.39 3810.67,5210.39 3820.84,5220.56 R9.1@3820.84,5238.39
$1N802: LED4.2 R13.1 | length 113.2
  Top Layer w10: LED4.2@3898.81,4503.39 3990.84,4503.39 R13.1@4005.84,4518.39
$1N803: LED3.2 R12.1 | length 107
  Top Layer w10: LED3.2@3898.81,4598.39 R12.1@4005.84,4598.39
$1N804: LED2.2 R11.1 | length 107
  Top Layer w10: LED2.2@3898.81,4693.39 R11.1@4005.84,4693.39
$1N805: LED1.2 R10.1 | length 113.2
  Top Layer w10: LED1.2@3898.81,4788.39 3990.84,4788.39 R10.1@4005.84,4773.39
$1N876: Q1.1 Q1.2 Q1.5 Q1.6 R7.2 | length 414.3
  Top Layer w10: R7.2@3820.84,5033.39 3855.84,4998.39 3930.5,4998.39 3950.5,5018.39 3950.5,5041.48 3972.41,5063.39 Q1.2@4005.58,5063.39 Q1.1@4005.58,5100.79 Q1.6@4105.42,5100.79 Q1.5@4105.42,5063.39
$1N881: JP21.3 R100.1 R101.1 | length 302
  Top Layer w19.68: JP21.3@4796.73,3340.15 4796.73,3402.16 4795.5,3403.39 4839.77,3447.65 R101.1@4839.77,3537.01 R100.1@4926.11,3537.01
$1N882: JP26.3 R92.1 R93.1 | length 327.6
  Top Layer w19.68: JP26.3@3458.14,3340.16 3458.14,3391.03 3489.38,3422.26 R92.1@3489.38,3537.01 R93.1@3607.22,3537.01
$1N883: JP14.3 R94.1 R95.1 | length 316.1
  Top Layer w19.68: JP14.3@3792.8,3340.15 3805.5,3352.87 3805.5,3393.39 3843.7,3431.59 R95.1@3843.7,3537.01 R94.1@3941.86,3537.01
$1N884: JP16.3 R96.1 R97.1 | length 316.1
  Top Layer w19.68: JP16.3@4127.44,3340.15 4135.5,3348.22 4135.5,3393.39 4178.35,3436.24 R97.1@4178.35,3537.01 R96.1@4276.51,3537.01
$1N885: JP19.3 R98.1 R99.1 | length 304.3
  Top Layer w19.68: JP19.3@4462.09,3340.15 4465.5,3343.58 4465.5,3398.39 4512.99,3445.88 R99.1@4512.99,3537.01 R98.1@4599.34,3537.01
$1N886: JP22.3 R102.1 R103.1 | length 340.4
  Top Layer w19.68: JP22.3@5131.38,3340.15 5131.37,3419.26 5174.41,3462.3 R103.1@5174.41,3537.01 R102.1@5300.13,3537.01
$1N906: JP24.1 R17.2 S3.C | length 1465
  Top Layer w20: R17.2@3485.5,4313.05 3485.5,4378.39 3451.68,4412.21 JP24.1@3310.03,4412.21 3259.32,4412.21 3230.5,4383.39 3230.5,3868.39 3251.5,3847.39 S3.C@3825.5,3847.39
$1N911: IC4.1 IC4.10 IC4.11 IC4.20 R30.1 | length 1328.1
  Top Layer w10: R30.1@4950.5,6032.71 5011.18,6032.71 5018.14,6025.75 IC4.20@5018.14,5983.39 5018.14,5945.75 5025.5,5938.39 5245.5,5938.39 5250.5,5943.39 IC4.11@5250.5,5981.34 ; IC4.1@5018.14,5747.08 5018.14,5660.75 5030.5,5648.39 5235.5,5648.39 5255.5,5668.39 IC4.10@5255.5,5740.04 ; IC4.10@5248.45,5747.09 IC4.10@5255.5,5740.04 ; IC4.11@5248.45,5983.39 IC4.11@5250.5,5981.34 ; v2(5365.5,5738.39) 5363.85,5740.04 IC4.10@5255.5,5740.04 ; v2(5380.5,5958.39) 5375.5,5953.39 5290.5,5953.39 5262.55,5981.34 IC4.11@5250.5,5981.34
  Bottom Layer w10: v2(5365.5,5738.39) 5380.5,5753.39 v2(5380.5,5958.39)
$1N913: IC4.15 R37.1 | length 254.5
  Top Layer w10: IC4.15@5146.09,5983.39 5146.09,6053.98 5160.5,6068.39 5294.82,6068.39 R37.1@5315.5,6047.71
$1N1605: JP9.5 Y.3
$1N1606: JP9.4 Y.2
$1N1618: JP12.6 Z.4
$1N1619: JP12.5 Z.3
$1N1620: JP12.4 Z.2
$1N1621: JP12.3 Z.1
$1N1632: JP15.6 N1.4
$1N1633: JP15.5 N1.3
$1N1634: JP15.4 N1.2
$1N1635: JP15.3 N1.1
$1N1646: JP18.6 N2.4
$1N1647: JP18.5 N2.3
$1N1648: JP18.4 N2.2
$1N1649: JP18.3 N2.1
$1N1750: IC9.15 R4.1 | length 352
  Top Layer w10: R4.1@6190.5,6003.39 6190.5,6028.39 6220.5,6058.39 6400.5,6058.39 6443.3,6015.59 IC9.15@6443.3,5971.54
$1N1751: IC9.1 IC9.10 IC9.11 IC9.20 R18.1 | length 1084.3
  Top Layer w10: IC9.1@6315.35,5735.23 6315.35,5683.54 6340.5,5658.39 6535.5,5658.39 6545.5,5668.39 6545.5,5735.09 IC9.10@6545.65,5735.24 6572.35,5735.24 v2(6575.5,5738.39) ; IC9.20@6315.35,5971.54 6315.35,5898.54 6330.5,5883.39 6525.5,5883.39 6545.65,5903.54 IC9.11@6545.65,5971.54 ; v2(6600.5,5933.39) R18.1@6600.5,5973.39
  Top Layer w20: IC9.11@6545.65,5971.54 6598.65,5971.54 R18.1@6600.5,5973.39
  Bottom Layer w10: v2(6575.5,5738.39) 6575.5,5913.39 6595.5,5933.39 v2(6600.5,5933.39)
$1N5715: JP9.3 Y.1
$1N7329: JP9.6 Y.4
$2N72: D7.A J8.2 LED5.1 Q8.4 | length 331.8
  Top Layer w60: D7.A@7648.5,5043.39 7680.5,5011.39 7680.5,4968.39 7809.67,4839.22 Q8.4@7809.67,4778.39
$2N73: R73.1 | length 107.9
  Top Layer w10: R73.1@7485.5,4898.05 7552.22,4898.05 7581.33,4868.94
$2N85: R82.1 | length 119.2
  Top Layer w10: R82.1@7485.5,4433.05 7545.84,4433.05 7581.33,4397.56 7581.33,4388.94
$2N86: D9.A J7.2 LED11.1 Q4.4 | length 239.7
  Top Layer w70: D9.A@7663.5,4518.39 7695.5,4486.39 7695.5,4453.39 Q4.4@7809.67,4339.22
$2N167: D5.2 Q10.1 R89.1
$2N170: LED10.2 R78.1 | length 101.2
  Top Layer w10: R78.1@7340.16,6358.39 7427.19,6358.39 LED10.2@7437.19,6368.39
$2N175: LED9.2 R77.1 | length 90.8
  Top Layer w10: R77.1@5650.5,5413.39 5650.5,5336.7 LED9.2@5660.5,5326.7
$2N468: IC15.7 R88.2 | length 240.8
  Top Layer w20: R88.2@6641.18,4033.39 6615.5,4059.07 6615.5,4198.39 6625.5,4208.39 IC15.7@6676.5,4208.39
$2N469: Q5.G R86.1 R88.1 | length 1095.6
  Top Layer w20: R88.1@6700.5,4033.39 7450.5,4033.39 7470.5,4053.39 R86.1@7625.84,4053.39 7630.5,4048.73 Q5.G@7630.5,3893.39
$2N586: IC14.7 R69.1 | length 250.2
  Top Layer w20: R69.1@5964.82,4018.39 5964.82,4039.07 5940.5,4063.39 5940.5,4198.39 5950.5,4208.39 IC14.7@5996.5,4208.39
$2N667: IC14.5 R70.1 | length 495.8
  Top Layer w20: IC14.5@5996.5,4108.39 6046.5,4058.39 6310.5,4058.39 6330.5,4078.39 6330.5,4138.39 6360.5,4168.39 6385.5,4168.39 R70.1@6385.5,4163.05
$2N797: LED5.2 R65.2 | length 97
  Top Layer w10: LED5.2@7970.5,4851.7 R65.2@7970.5,4948.73
$2N798: LED11.2 R84.2 | length 77
  Top Layer w10: LED11.2@7975.5,4291.7 R84.2@7975.5,4368.73
$2N799: LED7.2 R67.2 | length 82
  Top Layer w10: LED7.2@5903.81,3718.39 R67.2@5985.84,3718.39
$2N800: LED8.2 R68.2 | length 92
  Top Layer w10: LED8.2@6893.81,3733.39 R68.2@6985.84,3733.39
$2N801: LED12.2 R85.2 | length 89.1
  Top Layer w10: LED12.2@7848.81,3733.39 7930.84,3733.39 R85.2@7935.84,3738.39
$2N5943: D11.A J9.1 LED7.1 Q6.D
$2N6317: D12.A J11.1 LED8.1 Q7.D
$2N6624: D13.A J13.1 LED12.1 Q5.D
DIR1: IC1.80 JP71.1 | length 5235.6
  Top Layer w10: JP71.1@3946.53,7258.15 4085.74,7258.15 4095.5,7248.39 4095.5,5993.39 4170.5,5918.39 5256.44,5918.39 5271.44,5933.39 5375.5,5933.39 5390.5,5918.39 6045.5,5918.39 v2(6060.5,5933.39) ; IC1.80@5499.5,4676.38 5663.5,4676.38 5690.5,4703.39 6050.5,4703.39 v2(6080.5,4733.39)
  Bottom Layer w10: v2(6060.5,5933.39) 6080.5,5913.39 v2(6080.5,4733.39)
DIR2: IC1.49 JP91.1 | length 2827.7
  Top Layer w10: v2(4790.5,4583.39) 4823.5,4616.38 IC1.49@4881.5,4616.38
  Mid-Layer 1 w10: JP91.1@4733.93,7258.15 4820.5,7171.57 4820.5,6315.91 v2(4790.5,6285.91)
  Bottom Layer w10: v2(4790.5,4583.39) v2(4790.5,6285.91)
DIR3: IC1.58 JP121.1 | length 4683.9
  Top Layer w10: v2(4680.5,4323.39) 5070.5,4323.39 5092.5,4345.39 IC1.58@5092.5,4524.38 ; v2(4690.5,6183.39) 4690.5,6178.39 5100.5,6178.39 5120.5,6158.39 5627.99,6158.39 5680.97,6211.37 5695.5,7238.39 5675.74,7258.15 JP121.1@5541.01,7258.15
  Bottom Layer w10: v2(4680.5,4323.39) 4680.5,4343.39 4695.5,4358.39 4695.5,6178.39 v2(4690.5,6183.39)
DIR4: IC1.56 JP151.1 | length 5558.5
  Top Layer w10: v2(4585.5,4348.39) 4600.5,4363.39 5030.5,4363.39 5052.5,4385.39 IC1.56@5052.5,4524.38 ; v2(4605.5,6073.39) 4630.5,6098.39 6060.5,6098.39 6095.5,6063.39 6195.5,6063.39 6212.29,6080.18 6447.29,6080.18 6485.5,6118.39 6485.5,7228.39 6455.74,7258.15 JP151.1@6348.1,7258.15
  Bottom Layer w10: v2(4585.5,4348.39) 4595.5,4358.39 4595.5,4729.08 4575.5,4749.08 4575.5,5781.15 4595.5,5801.15 4595.5,6063.39 v2(4605.5,6073.39)
DIR5: IC1.50 JP181.1 | length 5754.1
  Top Layer w10: v2(4525.5,4523.39) 4545.5,4543.39 4785.5,4543.39 4839.5,4597.38 IC1.50@4881.5,4597.38 ; v2(4545.5,5813.39) 4585.5,5813.39 4602.49,5830.38 6672.49,5830.38 6725.5,5883.39 6725.5,6068.39 6800.5,6143.39 7155.5,6143.39 7240.5,6228.39 7240.5,7188.39 7170.74,7258.15 JP181.1@7135.49,7258.15
  Bottom Layer w10: v2(4525.5,4523.39) 4545.5,4543.39 v2(4545.5,5813.39)
EN1: IC1.81 JP71.8 | length 4322.4
  Top Layer w10: JP71.8@3946.53,6558.15 4010.5,6494.17 4010.5,5923.39 4080.5,5853.39 5990.5,5853.39 5995.5,5858.39 v2(5995.5,5863.39) ; IC1.81@5499.5,4695.38 5647.5,4695.38 5680.5,4728.39 5980.5,4728.39 v2(6000.5,4748.39)
  Bottom Layer w10: v2(5995.5,5863.39) 5995.5,5848.39 6000.5,5843.39 v2(6000.5,4748.39)
EN2: IC1.48 JP91.8 | length 2127.9
  Top Layer w10: v2(4720.5,4608.39) 4785.5,4608.39 4813.5,4636.38 IC1.48@4881.5,4636.38
  Mid-Layer 1 w10: v2(4733.93,6238.85) JP91.8@4733.93,6558.15
  Bottom Layer w10: v2(4720.5,4608.39) 4720.5,6141.82 4733.93,6155.25 v2(4733.93,6238.85)
EN3: IC1.59 JP121.8 | length 3498.5
  Top Layer w10: v2(4795.5,4298.39) 5080.5,4298.39 5111.5,4329.39 IC1.59@5111.5,4524.38 ; v2(4910.5,6283.39) 4920.5,6273.39 5515.5,6273.39 5541.01,6298.9 JP121.8@5541.01,6558.15
  Bottom Layer w10: v2(4795.5,4298.39) 4820.5,4323.39 4820.5,5647.69 4810.5,5657.69 4810.5,6233.39 4860.5,6283.39 v2(4910.5,6283.39)
EN4: IC1.57 JP151.8 | length 4570.5
  Top Layer w10: v2(4630.5,4338.39) 4638.51,4346.39 5053.51,4346.39 5072.5,4365.39 IC1.57@5072.5,4524.38 ; v2(4645.5,6173.39) 4660.5,6158.39 5066.73,6158.39 5085.73,6139.39 5671.5,6139.39 5690.5,6158.39 6300.5,6158.39 6348.1,6205.98 JP151.8@6348.1,6558.15
  Bottom Layer w10: v2(4630.5,4338.39) 4620.5,4348.39 4620.5,4735.83 4605.5,4750.83 4605.5,5788.31 4620.5,5803.31 4620.5,6048.06 4630.5,6058.06 4630.5,6158.39 v2(4645.5,6173.39)
EN5: IC1.85 JP181.8 | length 3300.3
  Top Layer w10: IC1.85@5499.5,4774.38 5556.5,4774.38 5625.5,4843.39 6505.5,4843.39 v2(6510.5,4848.39) ; v2(6545.5,6223.39) 6575.5,6253.39 7070.5,6253.39 7135.49,6318.38 JP181.8@7135.49,6558.15
  Bottom Layer w10: v2(6510.5,4848.39) 6545.5,4883.39 v2(6545.5,6223.39)